# EAGLE board Board_v1_0 (EAGLE 9.6.2)
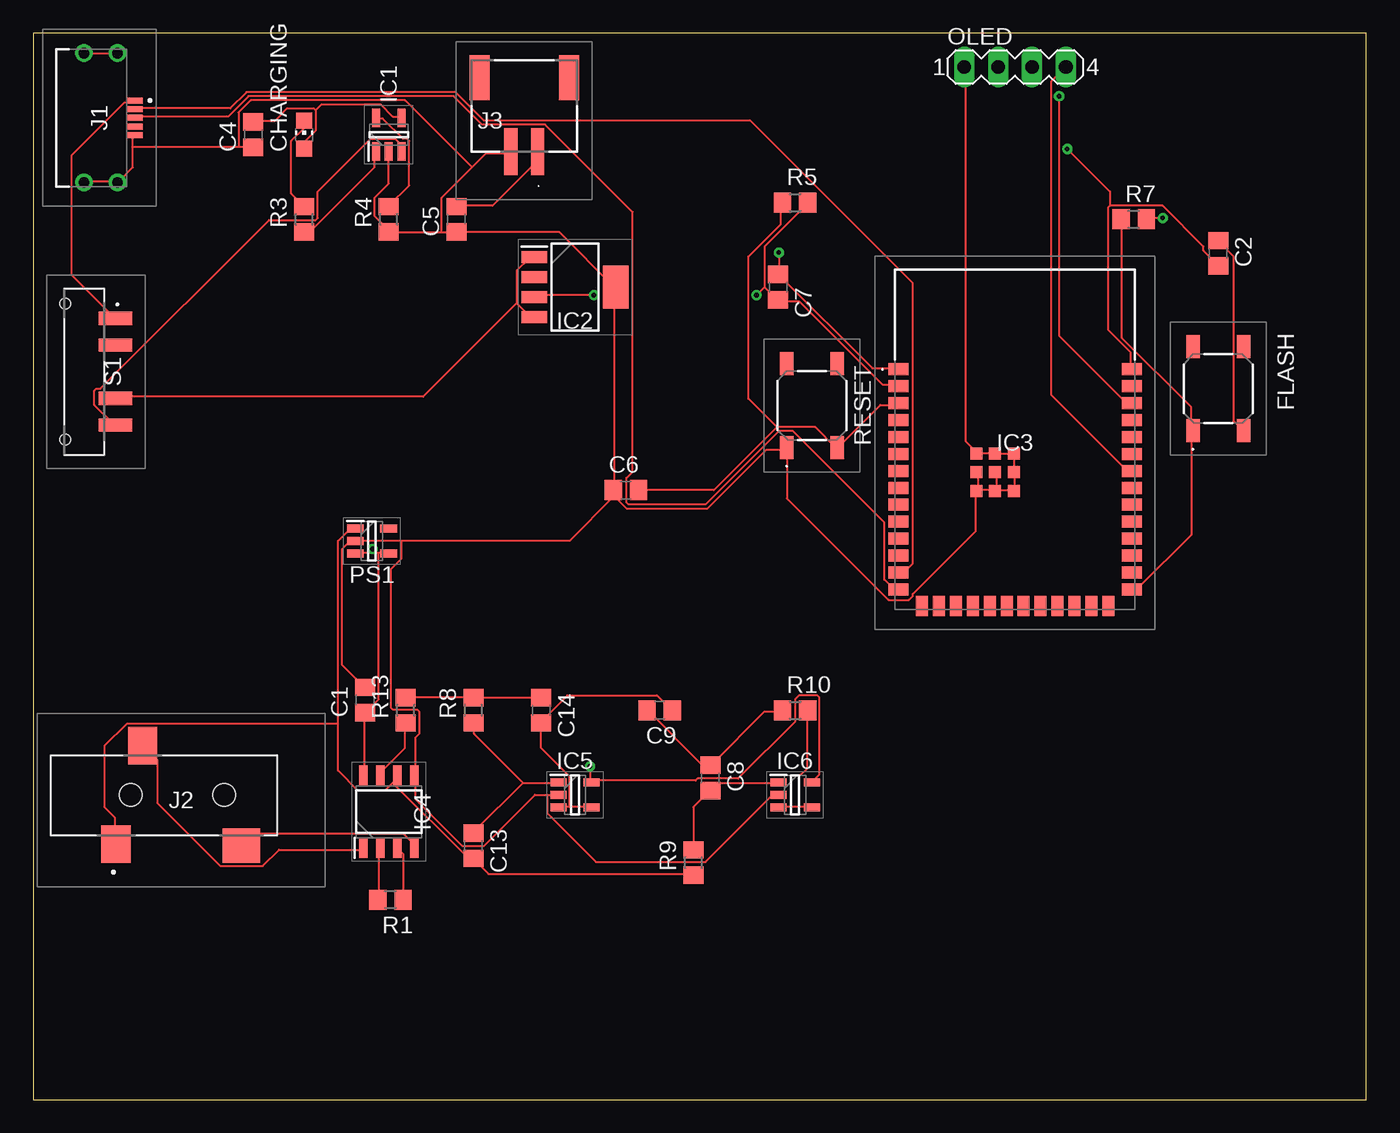
[diagram p0: board, top side]
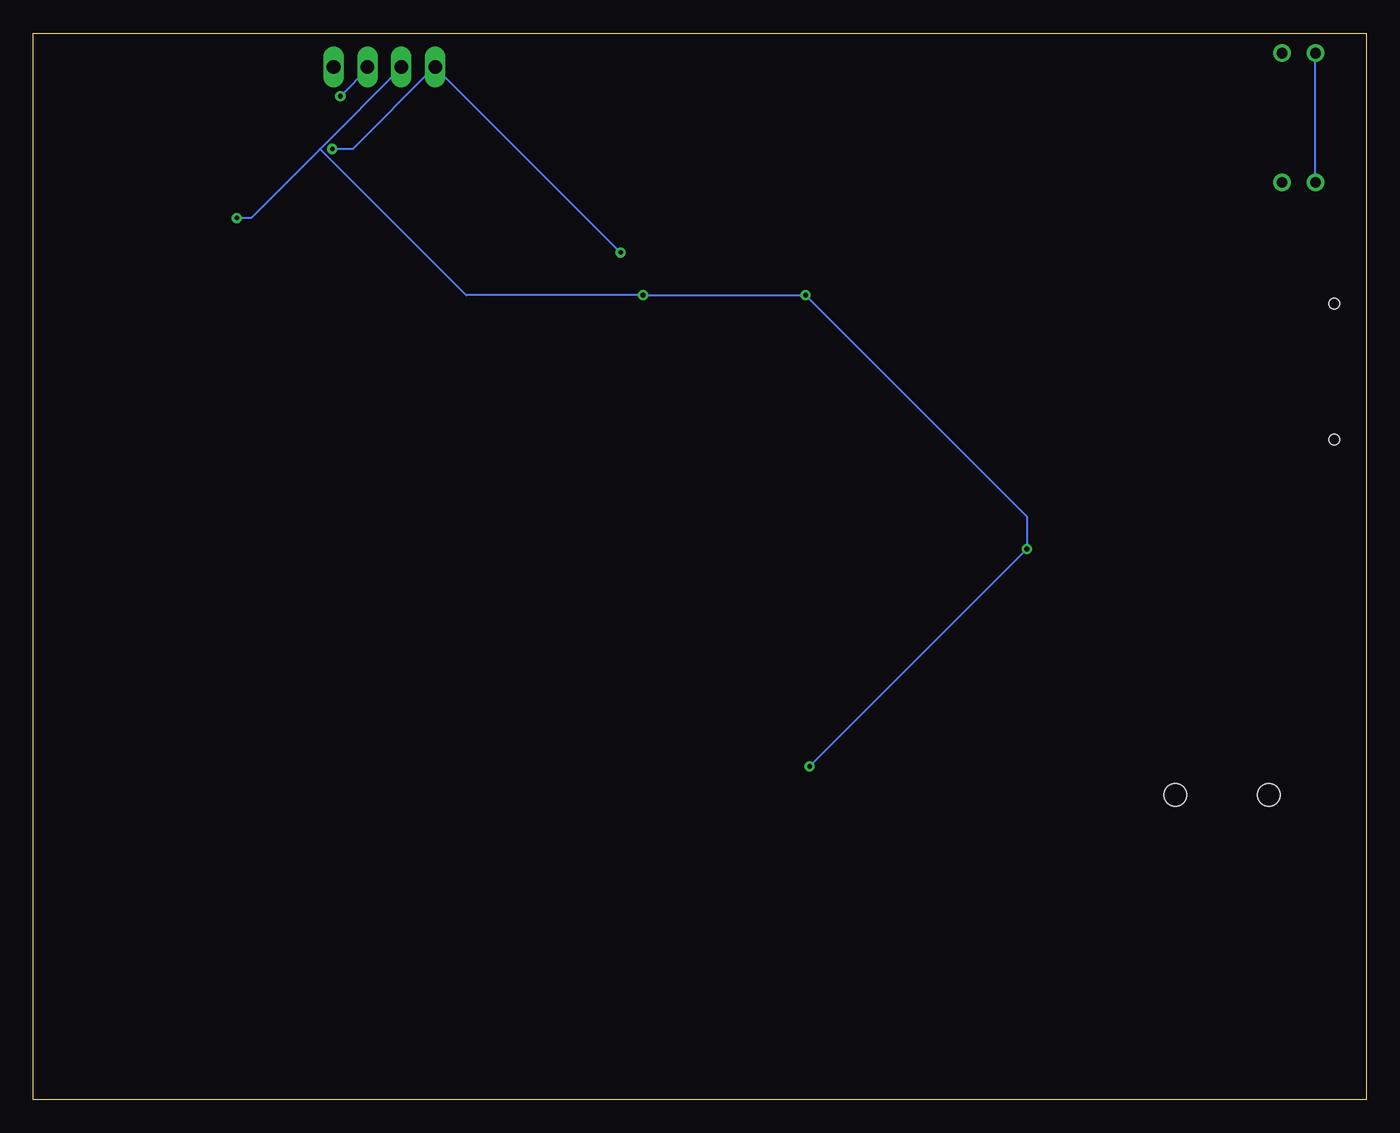
[diagram p1: board, bottom side, seen from below]

Size 100 x 80 mm. Coordinates in mm from the lower left corner, seen from the top.
Outline: 0,0 100,0 100,80 0,80 0,0
Copper layers (1*16): Top 0.035mm / dielectric 1.5mm / Bottom 0.035mm
Design rules "default": minimum track width 6mil, minimum drill 0.35mm, track to track 6mil, track to pad 6mil, pad to pad 6mil, via to via 6mil, smd to smd 6mil, copper to edge 40mil, drill to drill 6mil, minimum pad ring 10mil, minimum via ring 8mil, stop-mask expansion 4mil, vias tented up to drill 0mil, thermal gap 10mil

## Footprints (pad centres in the part's own frame; a part is rotated, then mirrored left to right if it is on the bottom)
C0805 = smd 1.3 x 1.5: 1 -0.95,0; 2 0.95,0
CHIP-LED0805 = smd 1.2 x 1.2: A 0,-1.05; C 0,1.05
TS18517SL160SMTTR = smd 1.7 x 1: 1 -3.15,1.9; 2 3.15,1.9; 3 -3.15,-1.9; 4 3.15,-1.9
SOT95P270X145-5N = smd 1.4 x 0.6: 1 -1.25,0.95; 2 -1.25,0; 3 -1.25,-0.95; 4 1.25,-0.95; 5 1.25,0.95
SOT150P700X180-5N = smd 1.9 x 0.9: 1 -3.05,2.25; 2 -3.05,0.75; 3 -3.05,-0.75; 4 -3.05,-2.25 | smd 1.9 x 3.2: 5 3.05,0
ESP32S3WROOM1N16R8 = smd 1.5 x 0.9: 1 -8.75,5.26; 2 -8.75,3.99; 3 -8.75,2.72; 4 -8.75,1.45; 5 -8.75,0.18; 6 -8.75,-1.09; 7 -8.75,-2.36; 8 -8.75,-3.63; 9 -8.75,-4.9; 10 -8.75,-6.17; 11 -8.75,-7.44; 12 -8.75,-8.71; 13 -8.75,-9.98; 14 -8.75,-11.25; 27 8.75,-11.25; 28 8.75,-9.98; 29 8.75,-8.71; 30 8.75,-7.44; 31 8.75,-6.17; 32 8.75,-4.9; 33 8.75,-3.63; 34 8.75,-2.36; 35 8.75,-1.09; 36 8.75,0.18; 37 8.75,1.45; 38 8.75,2.72; 39 8.75,3.99; 40 8.75,5.26 | smd 0.9 x 1.5: 15 -6.985,-12.5; 16 -5.715,-12.5; 17 -4.445,-12.5; 18 -3.175,-12.5; 19 -1.905,-12.5; 20 -0.635,-12.5; 21 0.635,-12.5; 22 1.905,-12.5; 23 3.175,-12.5; 24 4.445,-12.5; 25 5.715,-12.5; 26 6.985,-12.5 | smd 0.9 x 0.9: 41 -1.5,-2.46; 42 -2.9,-1.06; 43 -2.9,-2.46; 44 -2.9,-3.86; 45 -1.5,-3.86; 46 -0.1,-3.86; 47 -0.1,-2.46; 48 -0.1,-1.06; 49 -1.5,-1.06
SOIC127P600X175-8N = smd 1.525 x 0.65: 1 -2.712,1.905; 2 -2.712,0.635; 3 -2.712,-0.635; 4 -2.712,-1.905; 5 2.712,-1.905; 6 2.712,-0.635; 7 2.712,0.635; 8 2.712,1.905
SOT95P280X145-5N = smd 1.2 x 0.6: 1 -1.25,0.95; 2 -1.25,0; 3 -1.25,-0.95; 4 1.25,-0.95; 5 1.25,0.95
USB350030AKIT = smd 0.45 x 1.2: 1 -1.3,3.8; 2 -0.65,3.8; 3 0,3.8; 4 0.65,3.8; 5 1.3,3.8 | drill 0.8 pad 1.2: MH1 -4.85,2.5; MH2 4.85,2.5; MH3 -4.85,0; MH4 4.85,0
SJ3523SMTTR = smd 2.2 x 2.8: 1 2.4,-3.7; 3 4.4,3.7 | smd 2.8 x 2.6: 2 11.8,-3.8 | hole 1.7: 3.5,0; 10.5,0
1769 = smd 1 x 3.5: 1 -1,0; 2 1,0 | smd 1.5 x 3.4: 3 -3.35,-5.55; 4 3.35,-5.55
MA04-1 = drill 1.016 long: 1 -3.81,0; 2 -1.27,0; 3 1.27,0; 4 3.81,0
SOT95P280X110-5N = smd 1.25 x 0.6: 1 -1.25,0.95; 2 -1.25,0; 3 -1.25,-0.95; 4 1.25,-0.95; 5 1.25,0.95
R0805 = smd 1.3 x 1.5: 1 -0.95,0; 2 0.95,0
SS4CMVTR = smd 1 x 2.5: A1 -4,2.35; B1 -2,2.35; C1 2,2.35; D1 4,2.35 | hole 0.8: -5.1,-1.4; 5.1,-1.4

## Placement (x,y rotation side)
C1  [C0805]  24.89,29.97 90 top
C2  [C0805]  88.9,63.5 270 top
C4  [C0805]  16.51,72.39 90 top
C5  [C0805]  31.75,66.04 90 top
C6  [C0805]  44.45,45.72 0 top
C7  [C0805]  55.88,60.96 270 top
C8  [C0805]  50.8,24.13 270 top
C9  [C0805]  46.99,29.21 180 top
C13  [C0805]  33.02,19.05 270 top
C14  [C0805]  38.1,29.21 270 top
CHARGING  [CHIP-LED0805]  20.32,72.39 0 top
FLASH  TS18-5-17-SL-160-SMT-TR  [TS18517SL160SMTTR]  88.9,53.34 90 top
IC1  MCP73831T-2ACI_OT  [SOT95P270X145-5N]  26.67,72.39 90 top
IC2  LP38692MP-3.3_NOPB  [SOT150P700X180-5N]  40.64,60.96 0 top
IC3  ESP32-S3-WROOM-1-N16R8  [ESP32S3WROOM1N16R8]  73.66,49.53 0 top
IC4  AD8226ARZ  [SOIC127P600X175-8N]  26.67,21.59 90 top
IC5  LMV321IDBVRE4  [SOT95P280X145-5N]  40.64,22.86 0 top
IC6  LMV321IDBVRE4  [SOT95P280X145-5N]  57.15,22.86 0 top
J1  USB3500-30-A-KIT  [USB350030AKIT]  3.81,73.66 270 top
J2  SJ-3523-SMT-TR  [SJ3523SMTTR]  3.81,22.86 0 top
J3  1769  [1769]  36.83,71.12 180 top
OLED  [MA04-1]  73.66,77.47 0 top
PS1  REF2033AIDDCR  [SOT95P280X110-5N]  25.4,41.91 0 top
R1  [R0805]  26.8,14.99 180 top
R3  220  [R0805]  20.32,66.04 90 top
R4  [R0805]  26.67,66.04 90 top
R5  [R0805]  57.15,67.31 0 top
R7  [R0805]  82.55,66.04 0 top
R8  [R0805]  33.02,29.21 90 top
R9  [R0805]  49.53,17.78 90 top
R10  [R0805]  57.15,29.21 0 top
R13  [R0805]  27.94,29.21 90 top
RESET  TS18-5-17-SL-160-SMT-TR  [TS18517SL160SMTTR]  58.42,52.07 90 top
S1  SS4-CM-V-T_R  [SS4CMVTR]  3.81,54.61 270 top

## Library data of the parts
C1 C2 C4-C9 C13 C14 = rcl; SPICEPREFIX: C
CHARGING = led
FLASH RESET = TS18-5-17-SL-160-SMT-TR; DESCRIPTION: 5 x 5 mm, 1.7 mm Actuator Height, 160 gf, Silver, Surface Mount, TR, SPST, Tactile Switch; HEIGHT: 1.8mm; MANUFACTURER_NAME: Same Sky; MANUFACTURER_PART_NUMBER: TS18-5-17-SL-160-SMT-TR; MOUSER_PART_NUMBER: 179-TS18517SL160SMTT; MOUSER_PRICE-STOCK: https://www.mouser.co.uk/ProductDetail/CUI-Devices/TS18-5-17-SL-160-SMT-TR?qs=tlsG%2FOw5FFhWy38y3t272A%3D%3D
IC1 = MCP73831T-2ACI_OT; ARROW_PART_NUMBER: MCP73831T-2ACI/OT; ARROW_PRICE-STOCK: https://www.arrow.com/en/products/mcp73831t-2aciot/microchip-technology?utm_currency=USD&region=nac; DESCRIPTION: Li-Ion Charge Controller 4.2V SOT23-5; HEIGHT: 1.45mm; MANUFACTURER_NAME: Microchip; MANUFACTURER_PART_NUMBER: MCP73831T-2ACI/OT; MOUSER_PART_NUMBER: 579-MCP73831T-2ACIOT; MOUSER_PRICE-STOCK: https://www.mouser.co.uk/ProductDetail/Microchip-Technology/MCP73831T-2ACI-OT?qs=yUQqVecv4qvbBQBGbHx0Mw%3D%3D
IC2 = LP38692MP-3.3_NOPB; DESCRIPTION: LP38692MP-3.3/NOPB, Low Dropout Voltage Regulator, 1A, 3.3 V +/-2.5%, 2.7 10 Vin, 5-Pin SOT-223; HEIGHT: 1.8mm; MANUFACTURER_NAME: Texas Instruments; MANUFACTURER_PART_NUMBER: LP38692MP-3.3/NOPB; MOUSER_PART_NUMBER: 926-LP38692MP3.3NOPB; MOUSER_PRICE-STOCK: https://www.mouser.co.uk/ProductDetail/Texas-Instruments/LP38692MP-3.3-NOPB?qs=1FNqv8aZn1TpKuOP2NKBdg%3D%3D
IC3 = ESP32-S3-WROOM-1-N16R8; DESCRIPTION: Multiprotocol Modules SMD Module, ESP32-S3R8, 3.3V, 8 MB Octal PSRAM Die, 16 MB Quad SPI Flash, PCB Antenna; HEIGHT: 3.25mm; MANUFACTURER_NAME: Espressif Systems; MANUFACTURER_PART_NUMBER: ESP32-S3-WROOM-1-N16R8; MOUSER_PART_NUMBER: 356-ESP32S3WRM1N16R8; MOUSER_PRICE-STOCK: https://www.mouser.co.uk/ProductDetail/Espressif-Systems/ESP32-S3-WROOM-1-N16R8?qs=Li%252BoUPsLEnvQc9gW6AMhZg%3D%3D
IC4 = AD8226ARZ; DESCRIPTION: Wide Supply Range, Rail-to-Rail Output Instrumentation Amplifier; HEIGHT: 1.75mm; MANUFACTURER_NAME: Analog Devices; MANUFACTURER_PART_NUMBER: AD8226ARZ; MOUSER_PART_NUMBER: 584-AD8226ARZ; MOUSER_PRICE-STOCK: https://www.mouser.co.uk/ProductDetail/Analog-Devices/AD8226ARZ?qs=%2FtpEQrCGXCzihJADRPlhCg%3D%3D
IC5 IC6 = LMV321IDBVRE4; DESCRIPTION: OP Amp Single GP R-R O/P 5.5V 5-Pin SOT-23 T/R; HEIGHT: 1.45mm; MANUFACTURER_NAME: Texas Instruments; MANUFACTURER_PART_NUMBER: LMV321IDBVRE4; MOUSER_PART_NUMBER: 595-LMV321IDBVRE4; MOUSER_PRICE-STOCK: https://www.mouser.co.uk/ProductDetail/Texas-Instruments/LMV321IDBVRE4?qs=yhNIDeTE%252BcaI6cu5FHph6A%3D%3D
J1 = USB3500-30-A-KIT; DESCRIPTION: USB Connectors Micro B Skt, Mid Mount-SMT, R/A, 30u", With Peg, T&R, IP67 + USBTJ-02 Gasket; HEIGHT: 2.8mm; MANUFACTURER_NAME: GCT (GLOBAL CONNECTOR TECHNOLOGY); MANUFACTURER_PART_NUMBER: USB3500-30-A-KIT; MOUSER_PART_NUMBER: 640-USB3500-30-A-KIT; MOUSER_PRICE-STOCK: https://www.mouser.co.uk/ProductDetail/GCT/USB3500-30-A-KIT?qs=KUoIvG%2F9IlZmD2kH2DfgYg%3D%3D
J2 = SJ-3523-SMT-TR; DESCRIPTION: 3.5 mm, Stereo, Right Angle, Surface Mount (SMT), 3 Conductors, 0 Internal Switches, Audio Jack Connector; HEIGHT: 5.2mm; MANUFACTURER_NAME: Same Sky; MANUFACTURER_PART_NUMBER: SJ-3523-SMT-TR; MOUSER_PART_NUMBER: 490-SJ-3523-SMT-TR; MOUSER_PRICE-STOCK: https://www.mouser.co.uk/ProductDetail/CUI-Devices/SJ-3523-SMT-TR?qs=WyjlAZoYn51zOHzJ3r4ZRA%3D%3D
J3 = 1769; ARROW_PART_NUMBER: 1769; ARROW_PRICE-STOCK: https://www.arrow.com/en/products/1769/adafruit-industries?utm_currency=USD&region=nac; DESCRIPTION: Adafruit Accessories JST-PH 2-pin SMT Right Angle Connect; HEIGHT: 5.5mm; MANUFACTURER_NAME: Adafruit; MANUFACTURER_PART_NUMBER: 1769; MOUSER_PART_NUMBER: 485-1769; MOUSER_PRICE-STOCK: https://www.mouser.co.uk/ProductDetail/Adafruit/1769?qs=GURawfaeGuBbgoGtf2XstA%3D%3D
OLED = con-lstb; OC_FARNELL: unknown; OC_NEWARK: unknown
PS1 = REF2033AIDDCR; DESCRIPTION: Low-Drift, Low-Power, Dual-Output Vref and Vref/2 Voltage Reference; HEIGHT: 1.1mm; MANUFACTURER_NAME: Texas Instruments; MANUFACTURER_PART_NUMBER: REF2033AIDDCR; MOUSER_PART_NUMBER: 595-REF2033AIDDCR; MOUSER_PRICE-STOCK: https://www.mouser.co.uk/ProductDetail/Texas-Instruments/REF2033AIDDCR?qs=7z%252BmIopC6%2FKHHOBVNaL7UQ%3D%3D
R1 R3-R5 R7-R10 R13 = rcl; SPICEPREFIX: R
S1 = SS4-CM-V-T_R; DESCRIPTION: Slide Switches Slide Type 1P3T (2.0mm height); HEIGHT: 2mm; MANUFACTURER_NAME: Diptronics; MANUFACTURER_PART_NUMBER: SS4-CM-V-T/R; MOUSER_PART_NUMBER: 113-SS4CMVTR; MOUSER_PRICE-STOCK: https://www.mouser.co.uk/ProductDetail/Diptronics/SS4-CM-V-T-R?qs=MLItCLRbWswqNEU%2F6grMKg%3D%3D

## Nets
+3V3: C1.1 C7.2 IC2.3 IC3.2 IC4.8 IC5.5 IC6.5 OLED.2 PS1.3 PS1.4 R5.2 R7.2
+5V: J1.1 S1.A1
+BATT: IC1.3 S1.D1
+D: IC3.14 J1.3
-D: IC3.13 J1.2
DAC1: IC3.10
DAC2: IC3.11
GND: C1.2 C2.2 C4.1 C5.1 C6.1 C7.1 IC1.2 IC2.5 IC3.1 IC3.40 IC3.41 IC3.42 IC3.43 IC3.44 IC3.45 IC3.46 IC3.47 IC3.48 IC3.49 IC4.5 IC5.2 IC6.2 J1.5 J1.MH1 J1.MH2 J1.MH3 J1.MH4 J3.2 OLED.1 PS1.2 R4.1 RESET.1
IRQ_RA02: IC3.9
LED1: IC3.23
LED2: IC3.22
LED3: IC3.21
MISO: IC3.32
MOSI: IC3.39
N$1: IC4.2 R1.2
N$2: IC4.3 R1.1
N$3: IC4.1 J2.3
N$4: IC4.4 J2.2
N$5: C8.2 IC6.1 R9.2
N$6: IC1.1 R3.1
N$7: IC1.5 R4.2
N$8: CHARGING.C R3.2
N$9: C8.1 C9.2 R10.1
N$10: FLASH.1 IC3.27 R7.1
N$11: C13.1 IC5.1 R8.1
N$12: C2.1 FLASH.3
N$13: IC2.1 IC2.4 S1.C1
N$14: C5.2 J3.1
N$15: C4.2 CHARGING.A IC1.4
N$17: C14.1 R8.2 R13.2
NSS: IC3.30
OUT_ADC: IC3.7
RESET32: C6.2 IC3.3 R5.1 RESET.3
RST-RA: IC3.28
RX: IC3.36
SCK: IC3.31
SCL: IC3.38 OLED.3
SDA: IC3.34 OLED.4
TOUCHPAD1: IC3.17
TOUCHPAD2: IC3.18
TOUCHPAD3: IC3.19
TX: IC3.37
VOUT1: IC4.7 R13.1
VOUT2: C9.1 C14.2 IC5.3 IC5.4
VOUT3: IC6.3 IC6.4 R10.2
VSS: C13.2 IC4.6 J2.1 PS1.1 R9.1

## Tracks (layer width: path | path; a pad name or v marks a point on that pad's centre or on a via)
+3V3  (via drill 0.35)
  Top 0.152: v84.73,66.14 83.52,66.14 R7.2 | IC6.5 58.52,23.93 58.98,24.38 58.98,30.18 58.83,30.33 57.45,30.33 57.15,30.02 57.15,28.35 52.88,24.08 49.84,24.08 49.68,23.93 41.91,23.93 IC5.5 41.76,23.93 v41.76,24.99 | 25.91,41 26.52,41 PS1.4 | 25.91,41 25.45,41 | 25.45,41 24.23,41 PS1.3 | IC4.8 24.84,24.38 24.84,28.96 C1.1 24.99,29.11 25.91,30.02 25.91,41 | 54.86,60.96 55.78,60.05 C7.2 55.93,59.89 57.45,59.89 63.7,53.65 64.77,53.65 IC3.2 | 54.86,60.96 54.86,64.01 58.06,67.21 R5.2 | v42.06,60.35 37.64,60.35 IC2.3 | 54.86,60.96 v54.25,60.35 | v25.45,41.3 25.45,41
  Bottom 0.152: v84.73,66.14 83.67,66.14 78.49,71.32 | 78.49,71.32 72.39,77.42 OLED.2 | v41.76,24.99 v25.45,41.3 25.45,43.74 v42.06,60.35 v54.25,60.35 67.51,60.35 78.49,71.32
+5V
  Top 0.152: S1.A1 2.9,61.87 2.9,70.87 6.86,74.83 7.47,74.83 J1.1
+BATT
  Top 0.152: IC1.3 27.58,71.17 27.58,71.63 27.13,72.08 25.3,72.08 21.34,68.12 21.34,66.14 21.18,65.99 17.68,65.99 5.03,53.34 4.72,53.34 4.57,53.19 4.57,52.12 6.1,50.6 S1.D1
+D
  Top 0.152: J1.3 7.62,73.76 14.63,73.76 16.15,75.29 31.55,75.29 33.68,73.15 38.41,73.15 44.96,66.6 44.96,47.09 44.5,46.63 44.5,44.81 44.65,44.65 50.44,44.65 55.93,50.14 57,50.14 63.86,43.28 63.86,39.01 64.47,38.41 64.77,38.41 IC3.14
-D
  Top 0.152: J1.2 7.62,74.37 14.78,74.37 16,75.59 31.7,75.59 33.83,73.46 53.8,73.46 65.99,61.27 65.99,40.23 65.38,39.62 64.92,39.62 IC3.13
GND  (via drill 0.35)
  Top 0.152: 38.56,22.86 37.64,22.86 33.83,19.05 32.16,19.05 28.65,22.55 28.65,24.23 IC4.5 28.65,24.38 28.65,27.13 28.96,27.43 28.96,29.11 28.8,29.26 26.98,29.26 26.82,29.41 26.82,39.78 27.58,40.54 27.58,41.91 | 38.56,22.86 IC5.2 | IC6.2 55.47,22.86 50.44,17.83 42.22,17.83 38.56,21.49 38.56,22.86 | J1.MH3 3.81,78.49 6.25,78.49 J1.MH1 | 7.47,71.48 7.47,69.95 6.4,68.89 J1.MH2 6.25,68.89 3.81,68.89 J1.MH4 | 7.47,71.48 7.47,72.24 J1.5 | 7.47,71.48 15.39,71.48 | 15.39,71.48 16.46,71.48 C4.1 | 80.77,67.06 80.62,66.9 80.62,57.76 82.3,56.08 82.3,54.86 IC3.40 | 80.77,67.06 84.73,67.06 87.78,64.01 87.78,63.7 88.85,62.64 C2.2 | IC1.2 26.67,68.73 25.6,67.67 25.6,66.29 26.67,65.23 R4.1 26.67,65.08 30.63,65.08 | 30.63,65.08 31.7,65.08 C5.1 31.85,65.08 39.47,65.08 43.59,60.96 | 32.92,69.95 30.63,67.67 30.63,65.08 | 32.92,69.95 33.98,71.02 35.81,71.02 J3.2 | IC3.1 64.77,54.86 62.94,54.86 55.93,61.87 C7.1 55.93,62.03 v55.93,63.55 | C1.2 24.84,30.94 23.16,32.61 23.16,41.3 23.77,41.91 PS1.2 27.58,41.91 | 70.87,45.72 70.87,46.94 IC3.43 | 72.24,45.72 72.24,46.94 IC3.41 | 70.87,45.72 72.08,45.72 IC3.45 72.24,45.72 | 70.87,45.72 IC3.44 70.71,45.57 70.71,42.67 65.99,37.95 65.99,37.8 65.68,37.49 64.16,37.49 56.54,45.11 56.54,48.77 RESET.1 56.39,48.77 55.02,48.77 50.6,44.35 44.5,44.35 43.59,45.26 | 72.24,45.72 73.46,45.72 IC3.46 73.61,45.72 73.61,46.94 IC3.47 73.61,47.09 73.61,48.46 IC3.48 73.46,48.46 72.24,48.46 IC3.49 72.08,48.46 70.87,48.46 IC3.42 70.71,48.62 69.95,49.38 69.95,77.42 OLED.1 | 43.59,60.96 43.59,45.72 | 43.59,45.72 43.59,45.26 | 43.59,45.72 C6.1 43.59,45.26 | 27.58,41.91 40.23,41.91 43.59,45.26
  Top 0.152: 43.59,60.96 IC2.5 | 80.77,67.06 80.77,68.12 v77.57,71.32 | 15.39,71.48 15.39,74.07 16.31,74.98 27.89,74.98 32.92,69.95
  Bottom 0.152: J1.MH4 J1.MH3 | v55.93,63.55 OLED.1 69.95,77.42 76.05,71.32 v77.57,71.32
N$1
  Top 0.152: R1.2 25.91,15.09 25.91,18.75 IC4.2
N$2
  Top 0.152: R1.1 27.74,15.09 27.74,18.44 27.43,18.75 IC4.3
N$3
  Top 0.152: IC4.1 24.69,18.75 18.44,18.75 17.22,17.53 14.02,17.53 9.3,22.25 9.3,25.45 8.23,26.52 J2.3
N$4
  Top 0.152: IC4.4 28.5,18.9 28.5,19.2 27.74,19.96 16.46,19.96 15.7,19.2 J2.2
N$5
  Top 0.152: IC6.1 55.78,23.77 51.36,23.77 50.9,23.32 C8.2 50.75,23.16 49.53,21.95 R9.2
N$6
  Top 0.152: IC1.1 25.6,71.02 25.6,69.95 20.88,65.23 20.42,65.23 R3.1
N$7
  Top 0.152: IC1.5 25.76,73.61 26.21,73.61 27.74,72.08 28.04,72.08 28.19,71.93 28.19,68.58 26.67,67.06 R4.2
N$8
  Top 0.152: CHARGING.C 20.27,73.3 20.27,72.85 19.36,71.93 19.36,67.97 20.27,67.06 R3.2
N$9
  Top 0.152: C9.2 46.18,29.11 50.14,25.15 50.75,25.15 C8.1 50.9,25.15 54.86,29.11 56.08,29.11 R10.1
N$10
  Top 0.152: R7.1 81.69,65.99 81.69,57.15 86.87,51.97 86.87,50.29 FLASH.1 86.87,50.14 86.87,42.37 82.91,38.41 82.45,38.41 IC3.27
N$11
  Top 0.152: 36.73,23.77 39.32,23.77 IC5.1 | 36.73,23.77 33.07,20.12 C13.1 | 36.73,23.77 33.07,27.43 33.07,28.19 R8.1
N$12
  Top 0.152: C2.1 89,64.31 90.07,63.25 90.07,50.9 90.68,50.29 FLASH.3
N$13
  Top 0.152: 36.27,59.74 37.19,58.83 37.49,58.83 IC2.4 | 36.27,59.74 36.27,62.18 37.19,63.09 37.49,63.09 IC2.1 | 36.27,59.74 29.26,52.73 6.25,52.73 S1.C1
N$14
  Top 0.152: C5.2 31.85,67.06 34.44,67.06 37.8,70.41 37.8,71.02 J3.1
N$15
  Top 0.152: 21.18,74.22 21.18,72.69 20.42,71.93 20.42,71.48 CHARGING.A | 21.18,74.22 21.03,74.37 19.05,74.37 18.14,73.46 16.61,73.46 C4.2 | 21.18,74.22 21.64,74.68 26.06,74.68 26.98,73.76 27.58,73.76 IC1.4
N$17
  Top 0.152: R13.2 28.04,30.18 32.92,30.18 R8.2 33.07,30.18 38.1,30.18 C14.1
RESET32
  Top 0.152: C6.2 51.05,45.72 55.78,50.44 | 55.78,50.44 58.67,50.44 60.2,48.92 RESET.3 60.35,48.92 63.55,52.12 64.77,52.12 IC3.3 | 55.78,50.44 53.65,52.58 53.65,63.25 56.08,65.68 56.08,67.21 R5.1
SCL  (via drill 0.35)
  Top 0.152: v76.96,75.29 76.96,57.3 81.99,52.27 82.3,52.27 IC3.38
  Bottom 0.152: v76.96,75.29 74.83,77.42 OLED.3
SDA
  Top 0.152: OLED.4 76.35,76.35 76.35,52.88 81.99,47.24 82.3,47.24 IC3.34
VOUT1
  Top 0.152: R13.1 27.89,28.19 27.89,26.36 25.91,24.38 IC4.7
VOUT2
  Top 0.152: 40.23,21.95 41.76,21.95 IC5.4 | 40.23,21.95 39.47,21.95 IC5.3 | 40.23,21.95 40.23,24.23 38.1,26.36 C14.2 38.1,28.35 40.08,30.33 46.79,30.33 47.85,29.26 C9.1
VOUT3
  Top 0.152: 57.45,21.95 58.37,21.95 IC6.4 | 57.45,21.95 55.93,21.95 IC6.3 | 57.45,21.95 57.45,24.23 58.06,24.84 58.06,29.11 R10.2
VSS
  Top 0.152: 22.86,28.19 22.86,24.69 24.38,23.16 26.36,23.16 26.98,23.77 | 22.86,28.19 22.86,41.91 23.77,42.82 24.08,42.82 PS1.1 | 26.98,23.77 27.43,24.23 IC4.6 | 26.98,23.77 32.61,18.14 32.92,18.14 C13.2 33.07,17.98 34.14,16.92 49.53,16.92 R9.1 | 22.86,28.19 7.01,28.19 5.33,26.52 5.33,21.95 6.1,21.18 6.1,19.2 J2.1